# Altium PCB USB_HUBwithSTLink.PcbDoc
Units mil, origin at the board's own origin, x right, y up, seen from the top; angles counter-clockwise.
Board outline 1475 x 2725 mil, 2 copper layers (Top Layer, Bottom Layer); 68 components, 50 nets, 249 pads, 80 vias.
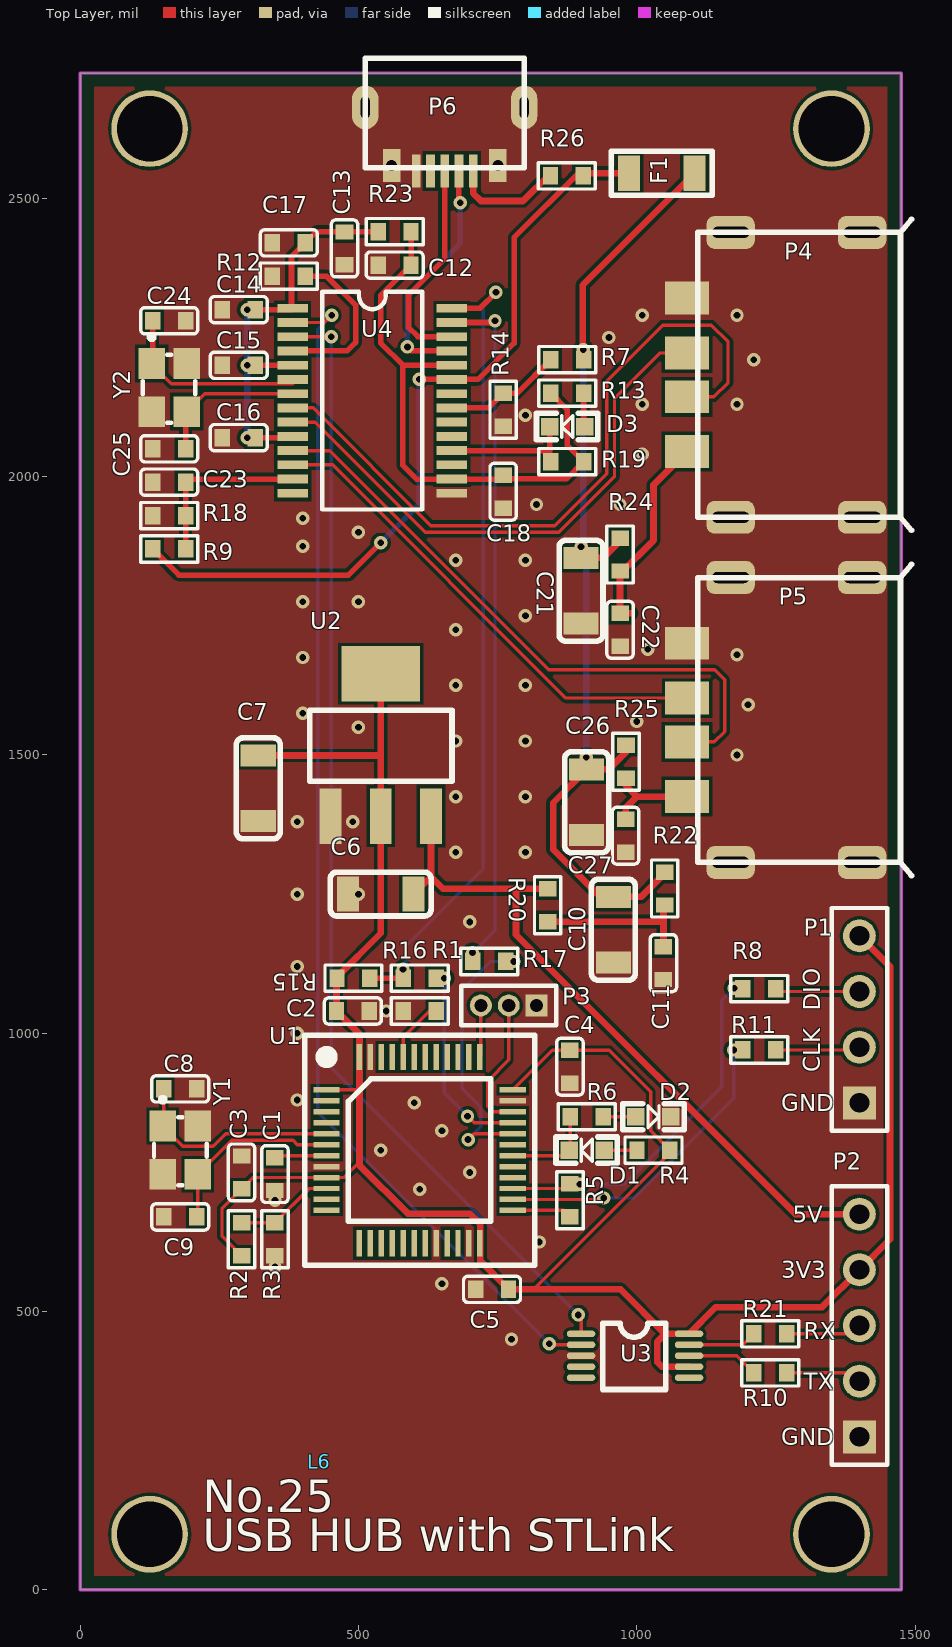
[diagram p0: Top Layer view]
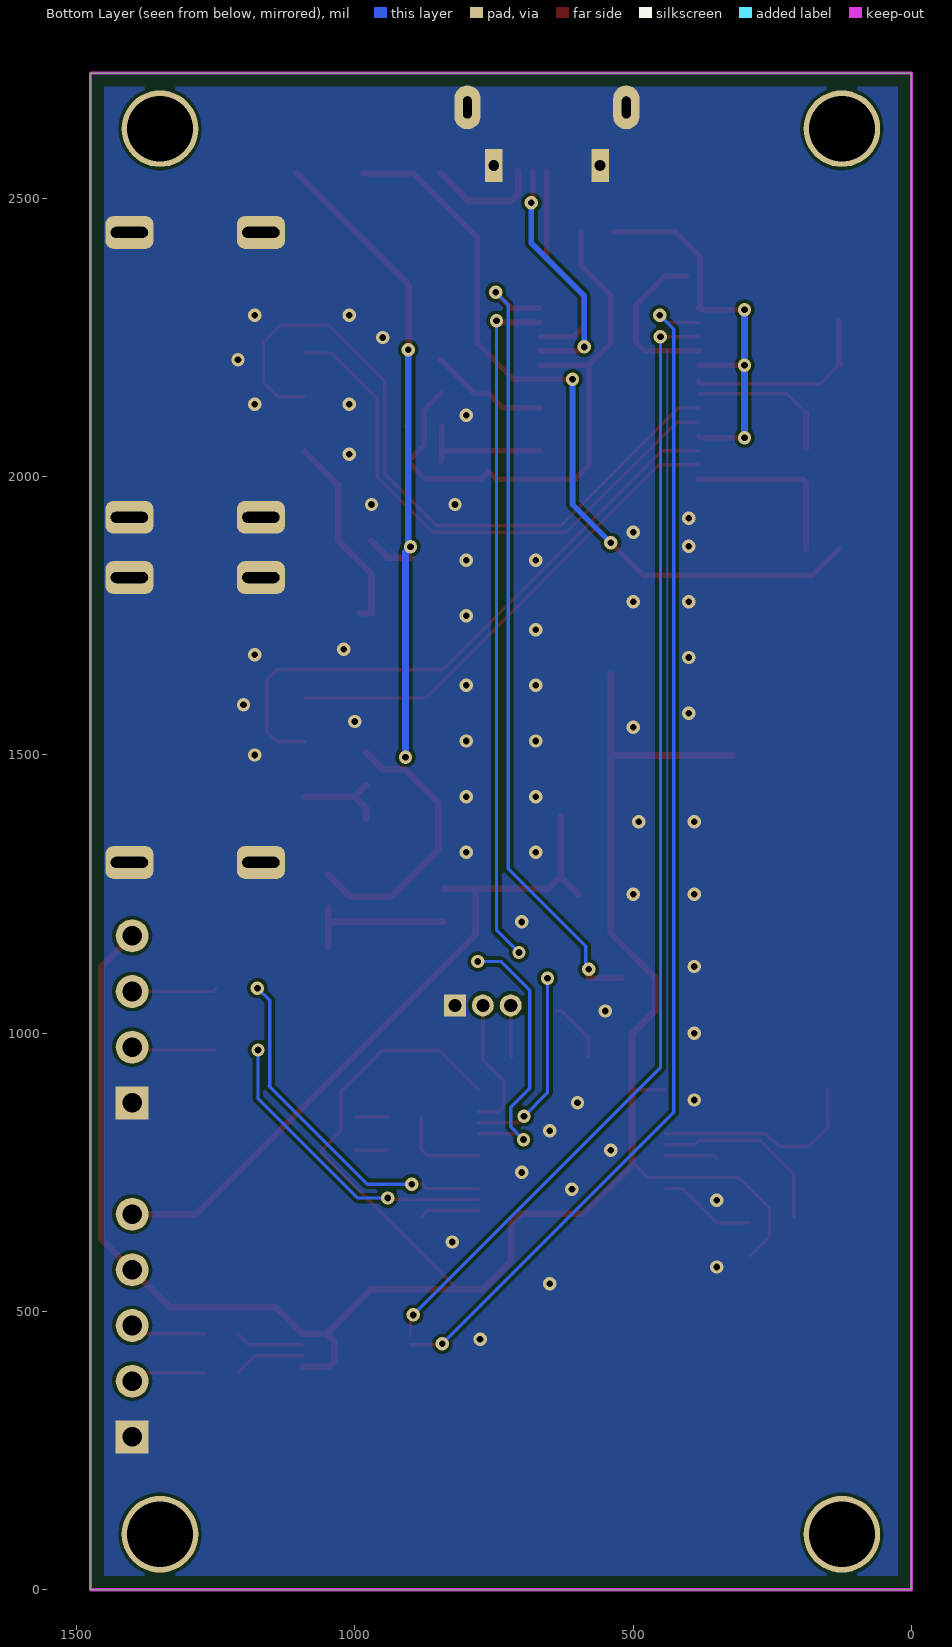
[diagram p1: Bottom Layer view, seen from below]
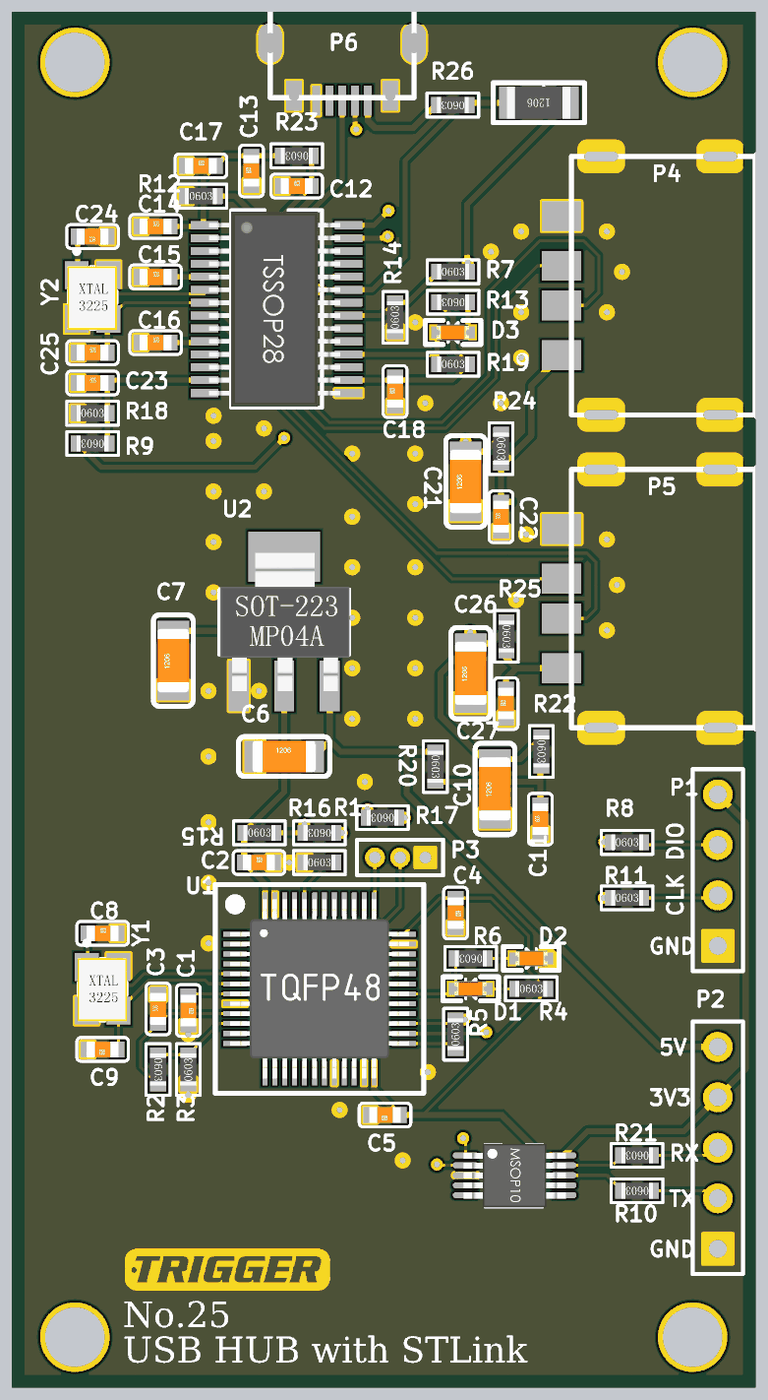
[diagram p2: 3D render of the assembled board from above, using the file's embedded part models]

## Layer stack, top to bottom
Top Solder: solder mask 0.4, Solder Resist, Dk 3.5
Top Layer: signal copper 1.4
Dielectric 1: dielectric 12.6, FR-4, Dk 4.8
Bottom Layer: signal copper 1.4
Bottom Solder: solder mask 0.4, Solder Resist, Dk 3.5

## Board outline
0,0 1475,0 1475,2725 0,2725

## Design rules (kind name [scope] priority, off if disabled: settings)
Clearance [All] p1: gap=6
ComponentClearance [All] p1 off: gap=10 collisioncheckmode=3 verticalgap=10 showdistances=FALSE
Height [All] p1 off: minheight=0 maxheight=1000 prefheight=500
HoleSize [All] p1 off: absolutevalues=TRUE maxlimit=100 minlimit=1 maxpercent=80.000 minpercent=20.000
HoleToHoleClearance [All] p1 off: gap=10 allowstackedmicrovias=TRUE
LayerPairs [All] p1 off: enforce=TRUE
MinimumSolderMaskSliver [All] p1 off: minsoldermaskwidth=10
NetAntennae [All] p1 off: netantennaetolerance=0
PlaneConnect [All] p1: planeconnectstyle=Direct reliefexpansion=20 reliefentries=4 reliefconductorwidth=10 reliefairgap=10
PolygonConnect [All] p1: connectstyle=Direct reliefconductorwidth=10 reliefentries=4 polygonreliefangle="90 Angle" airgapwidth=10
RoutingVias [All] p1: holewidth=12 width=24 viastyle="Through Hole" minholewidth=12 minwidth=24 maxholewidth=12 maxwidth=24
SilkToSilkClearance [All] p1 off: silktosilkclearance=10
SilkToSolderMaskClearance [IsPad] p1 off: minsilkscreentomaskgap=10 clearancetoexposedcopper=TRUE
SolderMaskExpansion [All] p1: expansion=4
Width [All] p1: maxlimit=100 minlimit=6 preferedwidth=6
20 further rules are at their usual default settings.

## Classes and differential pairs
component class STlink: C1 C2 C3 C4 C5 C6 C7 C8 C9 D1 D2 P1 P2 P3 R1 R2 R3 R4 R5 R6 R8 R10 R11 R20 R21 U1 U2 U3 Y1
component class USB_HUB: C10 C11 C12 C13 C14 C15 C16 C17 C18 C21 C22 C23 C24 C25 C26 C27 D3 F1 L6 P4 P5 P6 R7 R9 R12 R13 R14 R15 R16 R17 R18 R19 R22 R23 R24 R25 R26 U4 Y2

## Components (designator, comment, footprint, x,y, rotation, side; value= is the part's Value field where it differs from the comment)
C1 "104" 电容_C0603 350,747 r270 top
C2 "104" 电容_C0603 490,1040 r0 top
C3 "104" 电容_C0603 290,750 r90 top
C4 "104" 电容_C0603 880,940 r270 top
C5 "104" 电容_C0603 740,540 r180 top
C6 "10uF" 电容_C1206 540,1250 r0 top
C7 "22uF" 电容_C1206 320,1440 r90 top
C8 "22P" 电容_C0603 180,900 r0 top
C9 "22P" 电容_C0603 180,670 r180 top
C10 "100uF" 电容_C1206 958,1186 r90 top
C11 "104" 电容_C0603 1048,1126 r90 top
C12 "20PF" 电容_C0603 565,2380 r0 top
C13 "20PF" 电容_C0603 475,2410 r90 top
C14 "20PF" 电容_C0603 285,2300 r0 top
C15 "20PF" 电容_C0603 285,2200 r0 top
C16 "20PF" 电容_C0603 285,2070 r0 top
C17 "20PF" 电容_C0603 375,2420 r0 top
C18 "104" 电容_C0603 760,1973 r90 top
C21 "100uF" 电容_C1206 900,1795 r90 top
C22 "104" 电容_C0603 970,1725 r90 top
C23 "104" 电容_C0603 160,1990 r0 top
C24 "20PF" 电容_C0603 160,2280 r180 top
C25 "20PF" 电容_C0603 160,2050 r0 top
C26 "100uF" 电容_C1206 910,1415 r90 top
C27 "104" 电容_C0603 980,1355 r90 top
D1 "red" LED_0603 910,790 r180 top
D2 "green" LED_0603 1030,850 r0 top
D3 "Red" LED_0603 875,2090 r180 top
F1 "2A6V" 电阻_R1206 1045,2545 r180 top
L6 "LOGO" "LOGO L BS" 430,230 r0 top
P1 "Header 4" HDR1X4 1400,875 r90 top
P2 "Header 5" HDR1X5 1400,275 r90 top
P3 "MHDR1X3" MHDR1X3 820,1050 r180 top
P4 "USB MHDR" "接插件_USB母座 前贴后插 卷边 短体10" 1090,2045 r90 top
P5 "USB MHDR" "接插件_USB母座 前贴后插 卷边 短体10" 1090,1425 r90 top
P6 "MICRO USB" "接插件_MICRO 牛角插座 USB 直边" 655,2555 r0 top
R1 "10K" 电阻_R0603 610,1040 r0 top
R2 "4.7K" 电阻_R0603 290,630 r270 top
R3 "4.7K" 电阻_R0603 350,630 r90 top
R4 "1.5K" 电阻_R0603 1030,790 r0 top
R5 "100R" 电阻_R0603 880,700 r90 top
R6 "1.5K" 电阻_R0603 910,850 r180 top
R7 "10k" 电阻_R0603 875,2210 r0 top
R8 "10R" 电阻_R0603 1220,1080 r0 top
R9 "10k" 电阻_R0603 160,1870 r180 top
R10 "10R" 电阻_R0603 1240,390 r180 top
R11 "10R" 电阻_R0603 1220,970 r0 top
R12 "680R" 电阻_R0603 375,2360 r0 top
R13 "1k" 电阻_R0603 875,2150 r180 top
R14 "20k" 电阻_R0603 760,2120 r90 top
R15 "1.5K" 电阻_R0603 491,1099 r0 top
R16 "10R" 电阻_R0603 610,1099 r180 top
R17 "10R" 电阻_R0603 735,1129 r180 top
R18 "47k" 电阻_R0603 160,1930 r0 top
R19 "100k" 电阻_R0603 875,2027 r0 top
R20 "1R" 电阻_R0603 840,1230 r270 top
R21 "10R" 电阻_R0603 1240,460 r180 top
R22 "1R" 电阻_R0603 1050,1260 r270 top
R23 "1R" 电阻_R0603 565,2440 r180 top
R24 "1R" 电阻_R0603 970,1860 r270 top
R25 "1R" 电阻_R0603 980.67,1487.9 r270 top
R26 "0R" 电阻_R0603 874.46,2540.32 r180 top
U1 "STM32F103C8T6" ST主控_LQFP48 610,790 r0 top
U2 "AMS1117" 稳压芯片_SOT-223 450,1390 r0 top
U3 "CH340E" MSOP10 900,460 r0 top
U4 "GL850G" SSOP28 525,2140 r0 top
Y1 "12M" 晶振_3225 180,790 r270 top
Y2 "12M" 晶振_3225 160,2160 r270 top

## Footprints (in the part's own frame and the unit in brackets; to place one, negate y for a bottom-side part, rotate by r counter-clockwise, add the part's x,y. Pads: shape width x height; smd on the part's side, far side on the other; paste and mask are expansions set on the pad)
HDR1X4 [mm] "Connector; Header; 4 Position"
  rect 1.5x1.5 hole 0.9: 1(0,0)
  round 1.5 hole 0.9: 2(2.54,0) 3(5.08,0) 4(7.62,0)
  silkscreen extent -1.27,-1.27 8.89,1.27
HDR1X5 [mm] "Connector; Header; 5 Position"
  rect 1.5x1.5 hole 0.9: 1(0,0)
  round 1.5 hole 0.9: 2(2.54,0) 3(5.08,0) 4(7.62,0) 5(10.16,0)
  silkscreen extent -1.27,-1.27 11.43,1.27
LED_0603 [mm]
  rect 0.8x0.8 smd paste-0.1: A(-0.8,0) K(0.8,0)
  silkscreen extent -1.4,-0.6 1.4,0.6, body extent -0.8,-0.4 0.82,0.4, height 0.6
"LOGO L BS" [mil]
MHDR1X3 [mm] "Connector; Header; 3 Position"
  rect 1x1 hole 0.6: 1(0,0)
  round 1 hole 0.6: 2(1.27,0) 3(2.54,0)
  silkscreen extent -0.9,-0.9 3.44,0.9
MSOP10 [mm] "VSOP8"
  oval 1.3x0.3 smd: 1(0,0) 2(0,-0.5) 3(0,-1) 4(0,-1.5) 5(0,-2) 6(4.928,-2) 7(4.928,-1.5) 8(4.928,-1) 9(4.928,-0.5) 10(4.928,0)
  silkscreen extent 0.99,-2.54 3.86,0.48, body extent -0.11,-2.62 5.04,0.58, height 1.09
SSOP28 [mil]
  rect 55x15.75 smd: 1(-142.95,162.5) 2(-142.95,136.92) 3(-142.95,111.34) 4(-142.95,85.77) 5(-142.95,60.19) 6(-142.95,34.61) 7(-142.95,9.04) 8(-142.95,-16.54) 9(-142.95,-42.12) 10(-142.95,-67.69) 11(-142.95,-93.27) 12(-142.95,-118.85) 13(-142.95,-144.42) 14(-143,-170) 15(142.95,-170) 16(142.95,-144.42) 17(142.95,-118.85) 18(142.95,-93.27) 19(142.95,-67.69) 20(142.95,-42.12) 21(142.95,-16.54) 22(142.95,9.04) 23(142.95,34.62) 24(142.95,60.19) 25(142.95,85.77) 26(142.95,111.35) 27(142.95,136.92) 28(142.95,162.5)
  silkscreen extent -90,-199 90,192, body extent -134,-197 126,189, height 41
ST主控_LQFP48 [mm]
  rect 1.2x0.25 smd: 1(-4.25,2.75) 2(-4.25,2.25) 3(-4.25,1.75) 4(-4.25,1.25) 5(-4.25,0.75) 6(-4.25,0.25) 7(-4.25,-0.25) 8(-4.25,-0.75) 9(-4.25,-1.25) 10(-4.25,-1.75) 11(-4.25,-2.25) 12(-4.25,-2.75) 25(4.25,-2.75) 26(4.25,-2.25) 27(4.25,-1.75) 28(4.25,-1.25) 29(4.25,-0.75) 30(4.25,-0.25) 31(4.25,0.25) 32(4.25,0.75) 33(4.25,1.25) 34(4.25,1.75) 35(4.25,2.25) 36(4.25,2.75)
  rect 0.25x1.2 smd: 13(-2.75,-4.25) 14(-2.25,-4.25) 15(-1.75,-4.25) 16(-1.25,-4.25) 17(-0.75,-4.25) 18(-0.25,-4.25) 19(0.25,-4.25) 20(0.75,-4.25) 21(1.25,-4.25) 22(1.75,-4.25) 23(2.25,-4.25) 24(2.75,-4.25) 37(2.75,4.25) 38(2.25,4.25) 39(1.75,4.25) 40(1.25,4.25) 41(0.75,4.25) 42(0.25,4.25) 43(-0.25,4.25) 44(-0.75,4.25) 45(-1.25,4.25) 46(-1.75,4.25) 47(-2.25,4.25) 48(-2.75,4.25)
  silkscreen extent -5.25,-5.25 5.25,5.25, body extent -4.51,-4.51 4.51,4.51, height 1.1
"接插件_MICRO 牛角插座 USB 直边" [mm]
  oval 1.2x2 hole 0.4 slot 1 at 90 deg: 0(-3.625,2.75) 0(3.625,2.75)
  rect 0.8x1.5 hole 0.5: 0(-2.425,0.1) 0(2.425,0.1)
  rect 0.4x1.5 smd: 1(1.3,-0.15) 2(0.65,-0.15) 3(0,-0.15) 4(-0.65,-0.15) 5(-1.3,-0.15)
  silkscreen extent -3.62,0 3.62,5
"接插件_USB母座 前贴后插 卷边 短体10" [mm]
  rrect50% 1.5x2.2 hole 0.5 slot 1.7 at 90 deg: 0(-3,-2) 0(-3,-8) 0(10,-8) 0(10,-2)
  rect 1.5x2 smd: 1(0,0) 2(2.5,0) 3(4.5,0) 4(7,0)
  silkscreen extent -3.6,-10.25 10.6,-0.5
晶振_3225 [mm]
  rect 1.4x1.2 smd: 0(-1.1,0.8) 0(1.1,-0.8) 1(-1.1,-0.8) 2(1.1,0.8)
  silkscreen extent -2.4,-1.2 1.6,1.2, body extent -1.55,-1.27 1.65,1.23, height 0.8
电容_C0603 [mm]
  rect 0.7x0.8 smd: 1(-0.75,0) 2(0.75,0)
  silkscreen extent -1.3,-0.6 1.3,0.6, body extent -0.8,-0.4 0.8,0.4, height 0.3
电容_C1206 [mm]
  rect 1x1.6 smd: 1(-1.5,0) 2(1.5,0)
  silkscreen extent -2.3,-1 2.3,1, body extent -1.6,-0.8 1.6,0.8, height 1
电阻_R0603 [mm]
  rect 0.7x0.8 smd: 1(-0.75,0) 2(0.75,0)
  silkscreen extent -1.3,-0.6 1.3,0.6, body extent -0.8,-0.4 0.8,0.4, height 0.45
电阻_R1206 [mm]
  rect 1x1.6 smd: 1(-1.5,0) 2(1.5,0)
  silkscreen extent -2.3,-1 2.3,1, body extent -1.6,-0.8 1.6,0.8, height 0.6
稳压芯片_SOT-223 [mm]
  rect 1x2.54 smd: 1(0,0) 2(2.29,0) 3(4.58,0)
  rect 3.6x2.54 smd: 2(2.29,6.5)
  silkscreen extent -0.96,1.6 5.54,4.83, body extent -0.92,-0.27 5.58,6.69, height 1.7

## Part data
C1 C2 C3 C4 C5 C6 C7 C8 C9: library part cap
C10 C11 C12 C13 C14 C15 C16 C17 C18 C21 C22 C23 C24 C25 C26 C27: library part Cap
D1 D2 D3: library part LED
F1: library part Fuse
L6: library part LOGO_TRIGGER
P1: "Header, 4-Pin"
P2: "Header, 5-Pin"
P3: "Header, 3-Pin"
P6: library part "MICRO USB 5PIN"
R1 R2 R3 R4 R5 R6 R7 R8 R9 R10 R11 R12 R13 R14 R15 R16 R17 R18 R19 R20 R21 R22 R23 R24 R25 R26: library part Res
U4: "USBHUB"
Y1 Y2: library part XTAL_B

## Free pads (board coordinates)
  round 137.8 hole 118.11: 0(125,2625) 1(125,100) 2(1350,100) 3(1350,2625)

## Via types
v1: diameter 24, hole 12, Top Layer to Bottom Layer, 80 vias

## Nets (pads, with @x,y where several pads share a name; then routed paths per layer and width w, separated by ;. In a path a pad name is that pad's centre, name@x,y a point inside that pad or via, vN(x,y) a via of type N, cw(c..) or ccw(c..) an arc to the next point about the centre after c; other vN are vias at no path point)
3V3: C2.1 C3.1 C4.1 C5.1 C7.2 P1.4 P2.4 R2.2 R4.2 R15.1 U1.1 U1.9 U1.24 U1.36 U1.48 U2.2 U3.7 U3.10 | length 4238.8
  Top Layer w6: R2.2 255,635.47 255,685.47 C3.1 310.31,740.79 U1.9 474.05,740.79 502,768.73 ; U1.1 502,898.27 ; U1.36 848.58,969.53 C4.1 950.47,969.53 1025,895 1025,824.53 R4.2 ; 815,540 R4.2@1059.53,784.53
  Top Layer w12: C7.2 539.21,1499.06 ; U2.2@540.16,1645.91 540.16,1390 540.16,1179.69 460.47,1100 C2.1 502,998.47 502,898.27 502,768.73 502,762.73 588.73,676 700,676 719,657 719,590.53 C5.1 815,540 971,540 1051,460 ; U3.7 1045.06,400.94 1037,409 1037,446 1051,460 ; P1.4 1455,1120 1455,630 P2.4 1333,508 1142,508 U3.10 1051,460
5V: C6.2 P2.5 R20.1 U2.3 | length 1279.1
  Top Layer w12: C6.2 630.32,1281.26 ; U2.3 630.32,1281.26 ; R20.1 783,1259.53 ; P2.5 1284.96,675 783,1176.96 783,1259.53 ; 630.32,1281.26 652.05,1259.53 783,1259.53
AVDD: C13.2 C14.2 C15.2 C16.2 C17.2 R23.2 U4.1 U4.5 U4.10 | length 701.6
  Top Layer w10: C16.2 379.74,2070 U4.10 ; C15.2 381.86,2200 U4.5 ; C14.2 379.55,2300 U4.1 ; U4.1@379.75,2302.5 379.75,2395.22 C17.2 424.53,2440 R23.2
  Bottom Layer w12: v1(300,2070) v1(300,2200) v1(300,2300)
BT0: R1.2 U1.44 | length 113.9
  Top Layer w6: U1.44 580.47,992.47 628,1040 R1.2
DGND: C1.2 C2.2 C3.2 C4.2 C5.2 C6.1 C7.1 C8.2 C9.2 C10.1 C11.1 C12.1 C13.1 C14.1 C15.1 C16.1 C17.1 C18.1 C21.1 C22.1 C23.1 C24.1 C25.1 C26.1 C27.1 D2.K P1.1 P2.1 P3.1 P4.0 P4.4 P5.0 P5.4 P6.0 P6.5 R1.1 R3.1 R12.1 R14.1 R18.1 U1.8 U1.20 U1.23 U1.35 U1.47 U2.1 U3.3 U4.15 Y1.0 Y2.0
  other v1: 775,450 650,550 350,580 825,625 350,700 610,720 700,750 540,790 650,825 600,875 390,880 390,1000 550,1040 390,1120 700,1200 390,1250 500,1250 675,1325 800,1325 390,1380 490,1380 675,1425 800,1425 1180,1500 675,1525 800,1525 500,1550 1000,1560 400,1575 1200,1590 675,1625 800,1625 400,1675 1180,1680 1020,1690 675,1725 800,1750 400,1775 500,1775 675,1850 800,1850 400,1875 500,1900 400,1925 820,1950 970,1950 1010,2040 800,2110 1010,2130 1180,2130 1210,2210 950,2250 1010,2290 1180,2290
DM0: P6.2 U4.25 | length 439.4
  Top Layer w10: v1(588,2233) 595.23,2225.77 U4.25 ; P6.2 680.59,2494.41 v1(683,2492)
  Bottom Layer w10: v1(588,2233) 588,2325 683,2420 v1(683,2492)
DM1: R17.2 U4.27 | length 1230.6
  Top Layer w10: U4.27 742.4,2276.92 v1(745.47,2280)
  Bottom Layer w6: v1(705,1145) 745.47,1185.47 v1(745.47,2280)
DM2: U3.2 U4.2 | length 2161.4
  Top Layer w6: U4.2 438.92,2276.92 v1(452,2290) ; v1@844.69,440.31 U3.2
  Bottom Layer w6: v1(452,2290) 427,2265 427,858 v1(843,442)
DM3: P4.2 U4.8 | length 1285.9
  Top Layer w6: U4.8 418.54,2123.46 630,1912 853,1912 946,2005 946,2171 1047,2272 1134,2272 1164,2242 1164,2169 1138.43,2143.43 P4.2
DM4: P5.2 U4.11 | length 1115.2
  Top Layer w6: U4.11 448.27,2046.73 842,1653 1140,1653 1158,1635 1158,1542 1139.43,1523.43 P5.2
DP0: P6.3 U4.26 | length 392.9
  Top Layer w10: P6.3 655,2391 590,2326 590,2268 606.65,2251.35 U4.26
DP1: R15.2 R16.2 U4.28 | length 1436
  Top Layer w10: R15.2 R16.2 ; U4.28 718.5,2302.5 v1(747,2331)
  Bottom Layer w6: v1(580,1115) 585,1120 585,1156 724.47,1295.47 724.47,2308.47 v1(747,2331)
DP2: U3.1 U4.3 | length 2039
  Top Layer w6: U4.3 450.66,2251.34 v1(451,2251) ; U3.1 v1@900,489
  Bottom Layer w6: v1(451,2251) 451,938 v1(895,494)
DP3: P4.3 U4.9 | length 1005.4
  Top Layer w6: U4.9 422.12,2097.88 620,1900 860,1900 960,2000 960,2140 1042.17,2222.17 P4.3
DP4: P5.3 U4.12 | length 881.5
  Top Layer w6: U4.12 453.85,2021.15 872.83,1602.17 P5.3
DVDD: C12.2 C18.2 R13.2 R19.2 R23.1 U4.16 U4.24 | length 1053.6
  Top Layer w10: R23.1 C12.2 540,2325.47 540,2240 579.81,2200.19 ; U4.24 579.81,2200.19 ; R13.2 875,2120.47 875,2056.53 R19.2 873.53,1996 773.53,1996 760,2009.53 746.05,1995.58 U4.16 604.42,1995.58 579.81,2020.19 579.81,2200.19
MCU_RX: P2.3 R21.1 | length 136.7
  Top Layer w6: R21.1 1385,460 P2.3
MCU_TX: P2.2 R10.1 | length 136.7
  Top Layer w6: R10.1 1385,390 P2.2
NetC22_2: C22.2 P4.1 R24.2 | length 360.7
  Top Layer w12: 990.47,1754.53 C22.2 970,1825.47 1030,1885.47 1030,1985 P4.1
NetC27_2: C27.2 P5.1 R25.2 | length 167.4
  Top Layer w12: C27.2 980,1404.53 1000.47,1425 ; R25.2@980,1445.47 1000.47,1425 ; P5.1 1000.47,1425
NetD1_A: D1.A R4.1 | length 59
  Top Layer w6: D1.A R4.1
NetD2_A: D2.A R6.1 | length 59
  Top Layer w6: R6.1 D2.A
NetD3_A: D3.A R13.1 | length 60.8
  Top Layer w10: R13.1 904.53,2091.97 D3.A
NetP1_2: P1.2 R11.2 | length 152.5
  Top Layer w6: R11.2 1395,970 P1.2
NetP1_3: P1.3 R8.2 | length 152.5
  Top Layer w6: R8.2 1254.53,1075 P1.3
NetP6_1: P6.1 R26.2 | length 206
  Top Layer w12: P6.1 706.18,2508.82 720,2495 795.47,2495 R26.2@845.47,2545
NetR2_1: R2.1 R3.2 U1.10 | length 178.2
  Top Layer w6: R2.1 R3.2 411.58,721.1 U1.10
NetR10_2: R10.2 U3.8 | length 129.2
  Top Layer w6: U3.8 1179.84,420.63 R10.2
NetR21_2: R21.2 U3.9 | length 124.6
  Top Layer w6: U3.9 1190.79,440.31 R21.2
NRST0: C1.1 U1.7 | length 94.2
  Top Layer w6: C1.1 353.63,780.16 U1.7
OS_IN: C8.1 U1.5 Y1.1 | length 386.5
  Top Layer w6: Y1.1@148.05,832.85 184.15,796.75 238.85,796.75 261.63,819.53 U1.5 ; Y1.1 150.47,835.28 C8.1
OS_OUT: C9.1 U1.6 Y1.2 | length 337.1
  Top Layer w6: C9.1 211.5,671.97 Y1.2 272.33,807.53 382.47,807.53 390.16,799.84 U1.6
OVCUR1#: R7.1 R14.2 U4.21 | length 213.4
  Top Layer w10: U4.21 733.93,2123.46 R14.2 785,2149.53 R7.1
PGANG: D3.K R19.1 U4.18 | length 239.1
  Top Layer w10: U4.18 843.23,2046.73 ; D3.K 843.5,2028.97 R19.1
RES: C23.2 R9.1 R18.2 U4.13 | length 314.8
  Top Layer w10: R9.1 R18.2 C23.2 195.1,1995.58 U4.13
RREF: R12.2 U4.4 | length 298.3
  Top Layer w10: U4.4 479.77,2225.77 495,2241 495,2308 443,2360 R12.2
RX: U1.31
SCKS: P3.3 U1.37 | length 93.4
  Top Layer w6: U1.37 720,959.06 P3.3
SDIOS: P3.2 U1.34 | length 246.2
  Top Layer w6: P3.2 770,952 732,914 732,869 742.1,858.9 U1.34
"T JTCK": R11.1 U1.26 | length 558.9
  Top Layer w6: U1.26 938.42,701.42 v1(941,704)
  Bottom Layer w6: v1(941,704) 995,704 1174,883 v1(1174,970)
"T JTMS": R5.2 R8.1 U1.27 | length 620.6
  Top Layer w6: U1.27 871.58,721.1 R5.2
  Bottom Layer w6: v1(898,729) 978,729 1154,905 1153,906 1153,1059 v1(1175,1081)
"T SWDIO IN": R5.1 U1.25 | length 107.3
  Top Layer w6: U1.25 868.74,681.73 R5.1
TX: D1.K R6.2 U1.30 | length 166.1
  Top Layer w6: U1.30 868.66,780.16 D1.K 880.47,791.97 R6.2
USB_DM: R17.1 U1.32 | length 490.8
  Top Layer w6: v1(697,809) 707.53,819.53 U1.32
  Bottom Layer w6: v1(697,809) 720,832 720,867 686,901 686,1077 738,1129 v1(779,1129)
USB_DP: R16.1 U1.33 | length 351.6
  Top Layer w6: v1(696,851) 707.79,839.21 U1.33
  Bottom Layer w6: v1(654,1099) 654,893 v1(696,851)
VCC: F1.2 R9.2 R26.1 U4.23 | length 1416.9
  Top Layer w10: R9.2 177.47,1823 482,1823 v1(540,1881) ; v1(609,2175) U4.23@667.57,2175 ; U4.23 714.62,2174.62 779.75,2239.75 779.75,2429.75 895,2545 R26.1@904.53,2545
  Top Layer w12: R26.1@904.53,2545 F1.2
  Bottom Layer w10: v1(540,1881) 609,1950 v1(609,2175)
VDP: C10.2 C21.2 C26.2 F1.1 R7.2 R22.1 R24.1 R25.1 | length 1740.4
  Top Layer w12: C21.2 939.53,1854.06 R24.1@970,1884.53 ; R7.2 903,2211.53 903,2343.94 F1.1 ; R25.1@980,1504.53 949.53,1474.06 C26.2 850,1414.06 850,1330 934.94,1245.06 C10.2 1007.53,1245.06 R22.1@1048,1285.53
  Bottom Layer w12: v1(904,2228) 904,1878 v1(900,1874) 909,1865 v1(909,1496)
VIN: C11.2 R20.2 R22.2 | length 278.5
  Top Layer w12: R20.2 1047.53,1200.47 ; C11.2 R22.2@1048,1226.47
X1: C24.2 U4.6 Y2.1 | length 354.6
  Top Layer w6: Y2.1@128.5,2202.39 164.15,2166.75 382.05,2166.75 U4.6
  Top Layer w10: Y2.1@130.47,2204.36 C24.2
  Top Layer w12: Y2.1@128.5,2202.39 Y2.1@130.47,2204.36
X2: C25.2 U4.7 Y2.2 | length 271.5
  Top Layer w6: Y2.2 223.84,2149.04 U4.7
  Top Layer w10: C25.2 189.53,2114.72 Y2.2
pads on no net: P6.4 U1.2 U1.3 U1.4 U1.11 U1.12 U1.13 U1.14 U1.15 U1.16 U1.17 U1.18 U1.19 U1.21 U1.22 U1.28 U1.29 U1.38 U1.39 U1.40 U1.41 U1.42 U1.43 U1.45 U1.46 U3.4 U3.5 U3.6 U4.14 U4.17 U4.19 U4.20 U4.22

## Polygon pours and split planes (outlines as drawn)
DGND on Top Layer "DGND" (solid, pour order 0): 25,2375 25,2700 350,2700 1125,2700 1450,2700 1450,2375 1450,325 1450,25 1075,25 750,25 400,25 25,25 25,275
DGND on Bottom Layer "DGND" (solid, pour order 2): 25,2700 1450,2700 1450,25 25,25

## Keep-outs
Keep-Out Layer:
  the board outline again, w6

## Silkscreen, mask and mechanical layers (free items; w line width, h text height)
Top Overlay:
  text "DIO" at 1330,1040 h30 r90
  text "CLK" at 1330,930 h30 r90
  text "GND" at 1260,860 h30
  text "5V" at 1280,660 h30
  text "3V3" at 1260,560 h30
  text "RX" at 1300,450 h30
  text "TX" at 1300,360 h30
  text "GND" at 1260,260 h30
  text "No.25" at 220,120 h100
  text "USB HUB with STLink" at 220,50 h100
Mechanical 1:
  the board outline again, w6